# EAGLE board lightMiner (EAGLE 9.5.2)
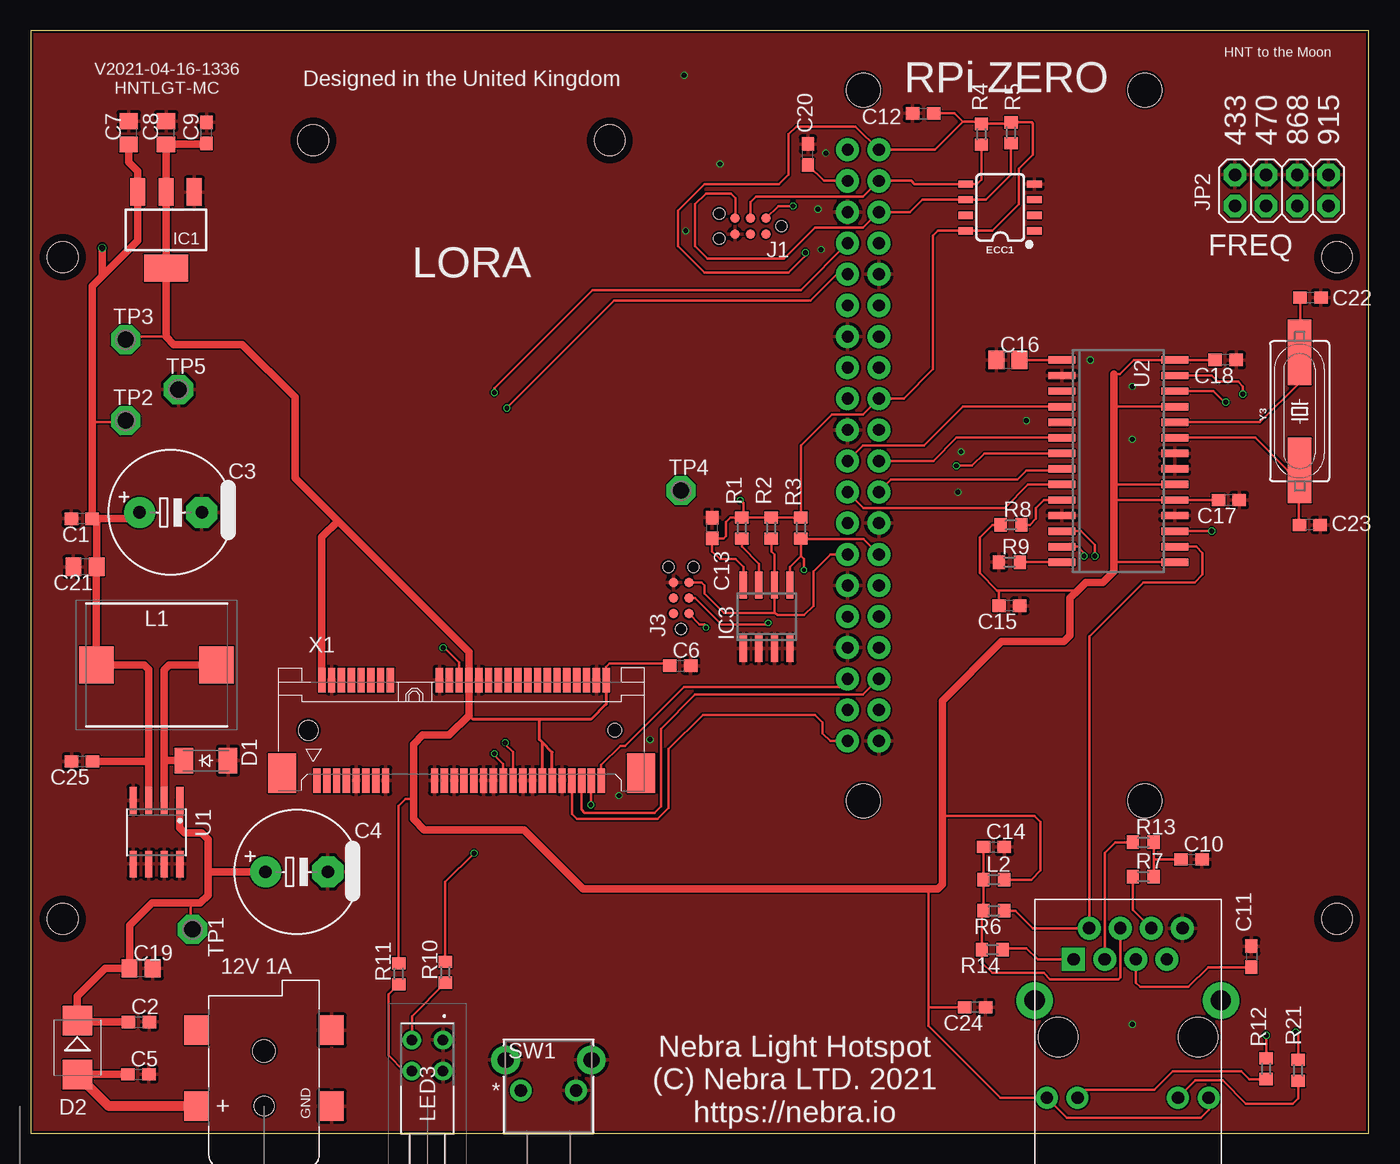
[diagram p0: board, top side]
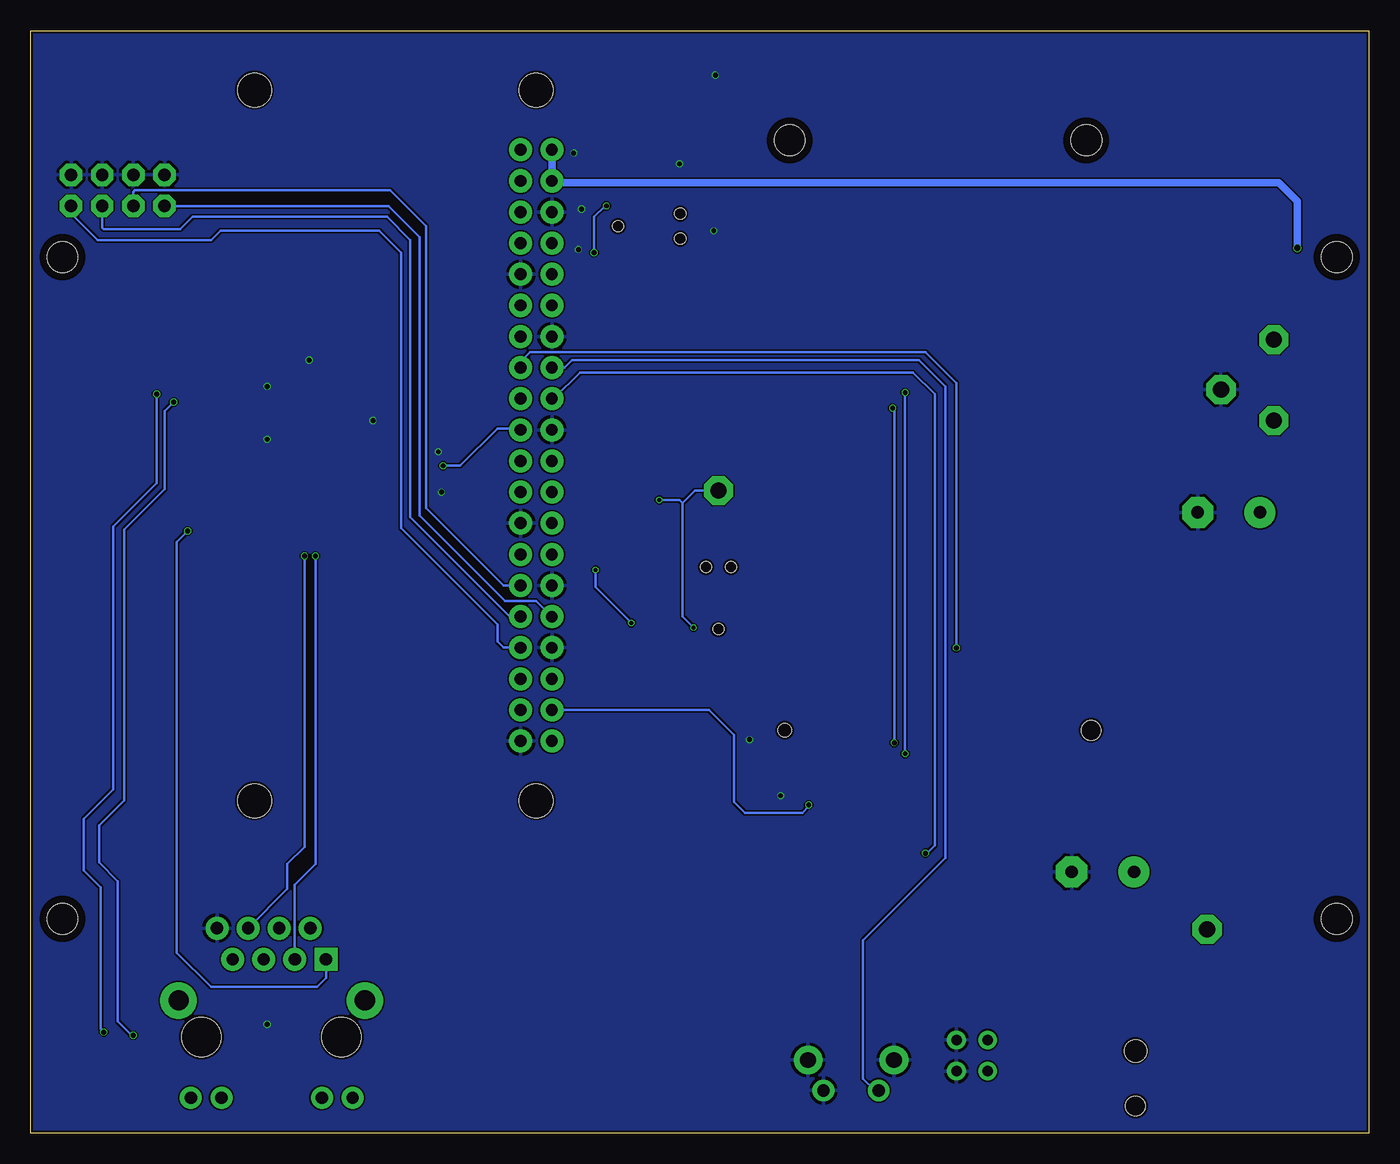
[diagram p1: board, bottom side, seen from below]

Size 109.22 x 90 mm. Coordinates in mm from the lower left corner, seen from the top.
Outline: 0,0 109.22,0 109.22,90 0,90 0,0
Copper layers (1*16): Top 0.035mm / dielectric 1.6mm / Bottom 0.035mm
Design rules "jlcpcb-2layers": minimum track width 5mil, minimum drill 0.3mm, track to track 5mil, track to pad 5mil, pad to pad 5mil, via to via 5mil, smd to smd 5mil, copper to edge 0.2mm, drill to drill 6mil, minimum pad ring 10mil, minimum via ring 3mil, stop-mask expansion 4mil, vias tented up to drill 0mil, thermal gap 10mil
Holes 2.5 mm at 2.62,17.5 106.62,17.5 2.62,71.5 106.62,71.5
tRestrict: area 0.8,69.7 to 4.4,73.3; area 0.8,15.7 to 4.4,19.3; area 104.8,15.7 to 108.4,19.3; area 104.8,69.7 to 108.4,73.3
bRestrict: area 0.8,69.7 to 4.4,73.3; area 104.8,15.7 to 108.4,19.3; area 104.8,69.7 to 108.4,73.3; area 0.8,15.7 to 4.4,19.3

## Footprints (pad centres in the part's own frame; a part is rotated, then mirrored left to right if it is on the bottom)
C0603 = smd 1.1 x 1: 1 -0.85,0; 2 0.85,0
E5-10,5 = drill 1.016 pad 2.54: + -2.54,0 | drill 1.016 pad 2.54 octagon: - 2.54,0
C0805 = smd 1.3 x 1.5: 1 -0.95,0; 2 0.95,0
DCJACK_2MM_SMT = smd 2.4 x 2: GND 0,-5.5; GNDBREAK 6.2,-5.5; PWR1 0,5.5; PWR2 6.2,5.5 | hole 1.6: 0,0 | hole 1.8: 4.5,0
SOD-123_MINI-SMA = smd 1.5 x 2.1: A 1.8,0; C -1.8,0
SMB = smd 2.4 x 2.4: A 2.2,0; C -2.2,0
SO08 = smd 0.6 x 1.2: 1 -1.905,-2.8; 2 -0.635,-2.8; 3 0.635,-2.8; 4 1.905,-2.8; 5 1.905,2.8; 6 0.635,2.8; 7 -0.635,2.8; 8 -1.905,2.8
SOT-223-3 = smd 1.219 x 2.235: 1 -2.311,-3.099; 2 0,-3.099; 3 2.311,-3.099 | smd 3.6 x 2.2: 4 0,3.099
SO-08 = smd 0.6 x 2.2: 1 -1.905,-2.6; 2 -0.635,-2.6; 3 0.635,-2.6; 4 1.905,-2.6; 5 1.905,2.6; 6 0.635,2.6; 7 -0.635,2.6; 8 -1.905,2.6
TC2030-MCP-NL = smd 0.787 x 0.787: 1 1.27,-0.635; 2 1.27,0.635; 3 2.54,-0.635; 4 2.54,0.635; 5 3.81,-0.635; 6 3.81,0.635 | hole 0.889: 0,0; 5.08,-1.016; 5.08,1.016
HR911105A = drill 1 pad 1.88 square: 1 5.05,2.485 | drill 1 pad 1.88: 2 3.78,-0.055; 3 2.51,2.485; 4 1.24,-0.055; 5 -0.03,2.485; 6 -1.3,-0.055; 7 -2.57,2.485; 8 -3.84,-0.055 | drill 1 pad 1.27: 9 7.225,13.79; 10 4.725,13.79; 11 -3.475,13.79; 12 -5.975,13.79 | drill 1.65 pad 2.184: M1 8.225,5.84; M2 -6.975,5.84 | hole 3.2: 6.32,8.835; -5.11,8.835
2X04 = drill 1.016 octagon: 1 -3.81,-1.27; 2 -3.81,1.27; 3 -1.27,-1.27; 4 -1.27,1.27; 5 1.27,-1.27; 6 1.27,1.27; 7 3.81,-1.27; 8 3.81,1.27
INDPM115100X410N = smd 2.8 x 3.05: 1 -4.9,0; 2 4.9,0
R0603 = smd 1 x 1.1: 1 -0.85,0; 2 0.85,0
LTL42D1NMHDP1 = drill 0.85 pad 1.381: 1 0,0; 2 0,2.54; 3 -2.54,0; 4 -2.54,2.54
SW2_1825027-C_TEC = drill 0.991 pad 1.499: 1 0,0; 2 4.496,0 | drill 1.295 pad 1.803: 3 -1.245,2.489; 4 5.766,2.489
P1-13 = drill 1.321 pad 2.159 octagon: TP 0,0
SO08' = smd 0.6 x 2.2: 1 -1.905,-2.6; 2 -0.635,-2.6; 3 0.635,-2.6; 4 1.905,-2.6; 5 1.905,2.6; 6 0.635,2.6; 7 -0.635,2.6; 8 -1.905,2.6
SO28W = smd 0.6 x 2.2: 1 -8.255,-4.6; 2 -6.985,-4.6; 3 -5.715,-4.6; 4 -4.445,-4.6; 5 -3.175,-4.6; 6 -1.905,-4.6; 7 -0.635,-4.6; 8 0.635,-4.6; 9 1.905,-4.6; 10 3.175,-4.6; 11 4.445,-4.6; 12 5.715,-4.6; 13 6.985,-4.6; 14 8.255,-4.6; 15 8.255,4.6; 16 6.985,4.6; 17 5.715,4.6; 18 4.445,4.6; 19 3.175,4.6; 20 1.905,4.6; 21 0.635,4.6; 22 -0.635,4.6; 23 -1.905,4.6; 24 -3.175,4.6; 25 -4.445,4.6; 26 -5.715,4.6; 27 -6.985,4.6; 28 -8.255,4.6
RASPBERRY-PI-ZERO = drill 0.97 pad 1.88: 1 -23.97,23.23; 2 -23.97,25.77; 3 -21.43,23.23; 4 -21.43,25.77; 5 -18.89,23.23; 6 -18.89,25.77; 7 -16.35,23.23; 8 -16.35,25.77; 9 -13.81,23.23; 10 -13.81,25.77; 11 -11.27,23.23; 12 -11.27,25.77; 13 -8.73,23.23; 14 -8.73,25.77; 15 -6.19,23.23; 16 -6.19,25.77; 17 -3.65,23.23; 18 -3.65,25.77; 19 -1.11,23.23; 20 -1.11,25.77; 21 1.43,23.23; 22 1.43,25.77; 23 3.97,23.23; 24 3.97,25.77; 25 6.51,23.23; 26 6.51,25.77; 27 9.05,23.23; 28 9.05,25.77; 29 11.59,23.23; 30 11.59,25.77; 31 14.13,23.23; 32 14.14,25.77; 33 16.67,23.23; 34 16.67,25.77; 35 19.21,23.23; 36 19.21,25.77; 37 21.75,23.23; 38 21.75,25.77; 39 24.29,23.23; 40 24.29,25.77 | hole 2.75: -28.84,24.5; 29.16,24.5; -28.84,1.5; 29.16,1.5
679105700 = smd 0.6 x 2: 1 0.7,-4.1; 2 1.1,4.1; 3 1.5,-4.1; 4 1.9,4.1; 5 2.3,-4.1; 6 2.7,4.1; 7 3.1,-4.1; 8 3.5,4.1; 9 3.9,-4.1; 10 4.3,4.1; 11 4.7,-4.1; 12 5.1,4.1; 13 5.5,-4.1; 14 5.9,4.1; 15 6.3,-4.1; 16 6.7,4.1; 17 10.3,-4.1; 18 10.7,4.1; 19 11.1,-4.1; 20 11.5,4.1; 21 11.9,-4.1; 22 12.3,4.1; 23 12.7,-4.1; 24 13.1,4.1; 25 13.5,-4.1; 26 13.9,4.1; 27 14.3,-4.1; 28 14.7,4.1; 29 15.1,-4.1; 30 15.5,4.1; 31 15.9,-4.1; 32 16.3,4.1; 33 16.7,-4.1; 34 17.1,4.1; 35 17.5,-4.1; 36 17.9,4.1; 37 18.3,-4.1; 38 18.7,4.1; 39 19.1,-4.1; 40 19.5,4.1; 41 19.9,-4.1; 42 20.3,4.1; 43 20.7,-4.1; 44 21.1,4.1; 45 21.5,-4.1; 46 21.9,4.1; 47 22.3,-4.1; 48 22.7,4.1; 49 23.1,-4.1; 50 23.5,4.1; 51 23.9,-4.1; 52 24.3,4.1 | smd 2.3 x 3.2: M1 27.15,-3.5; M2 -2.15,-3.5 | hole 1.6: 0,0 | hole 1.1: 25,0 | hole 2.5: 0.4,48.15; 24.6,48.15
HC49UP = smd 5.334 x 1.93: 1 -4.826,0; 2 4.826,0

## Placement (x,y rotation side)
C1  100nF  [C0603]  4.17,50.16 180 top
C2  100nF  [C0603]  8.84,9.09 0 top
C3  330uF  [E5-10,5]  11.43,50.67 0 top
C4  330uF  [E5-10,5]  21.72,21.34 0 top
C5  100nF  [C0603]  8.79,4.81 0 top
C6  100nF  [C0603]  53.02,38.16 0 top
C7  10uF  [C0805]  8,81.66 90 top
C8  10uF  [C0805]  11.05,81.66 90 top
C9  100nF  [C0603]  14.35,81.66 90 top
C10  10nF  [C0603]  94.74,22.35 0 top
C11  100nF  [C0603]  99.63,14.41 270 top
C12  100nF  [C0603]  72.83,83.25 0 top
C13  100nF  [C0603]  55.63,49.4 90 top
C14  100nF  [C0603]  78.61,23.37 0 top
C15  100nF  [C0603]  79.88,43.05 180 top
C16  10uF  [C0805]  79.76,63.12 0 top
C17  100nF  [C0603]  97.79,51.69 180 top
C18  100nF  [C0603]  97.54,63.12 180 top
C19  10uF  [C0805]  9.02,13.46 0 top
C20  100nF  [C0603]  63.44,79.88 90 top
C21  10uF  [C0805]  4.44,46.23 180 top
C22  18pF  [C0603]  104.46,68.2 180 top
C23  18pF  [C0603]  104.39,49.66 180 top
C24  100nF  [C0603]  77.09,10.29 180 top
C25  100nF  [C0603]  4.19,30.35 180 top
CN1  [DCJACK_2MM_SMT]  19.05,2.22 90 top
D1  CGRM4001-G  [SOD-123_MINI-SMA]  14.3,30.42 0 top
D2  [SMB]  3.81,6.99 270 top
ECC1  ATECC608  [SO08]  79.12,75.56 90 top
IC1  LM1117-SOT223  [SOT-223-3]  11.05,73.72 180 top
IC3  24C32ASN  [SO-08]  60.07,42.16 0 top
J1  [TC2030-MCP-NL]  61.28,74.04 180 top
J2  HR911105A  [HR911105A]  90.17,16.68 180 top
J3  [TC2030-MCP-NL]  53.09,41.15 90 top
JP2  [2X04]  102.11,76.96 0 top
L1  7419290  [INDPM115100X410N]  10.27,38.22 180 top
L2  [R0603]  78.61,20.7 0 top
LED3  LTL-42D1NMHDP1  [LTL42D1NMHDP1]  33.66,7.62 90 top
R1  4.7k  [R0603]  58.04,49.4 90 top
R2  4.7k  [R0603]  60.45,49.4 90 top
R3  4.7k  [R0603]  62.86,49.4 90 top
R4  4.7k  [R0603]  77.6,81.53 90 top
R5  4.7k  [R0603]  80.01,81.66 90 top
R6  49.9R  [R0603]  78.61,18.16 180 top
R7  49.9R  [R0603]  90.8,20.95 0 top
R8  10K  [R0603]  80.01,49.66 0 top
R9  2.32K  [R0603]  79.88,46.61 0 top
R10  470r  [R0603]  33.85,13.14 90 top
R11  470r  [R0603]  30.04,13.02 90 top
R12  470r  [R0603]  100.84,5.27 90 top
R13  49.9R  [R0603]  90.8,23.75 0 top
R14  49.9R  [R0603]  78.49,14.99 180 top
R21  470r  [R0603]  103.44,5.14 90 top
SW1  1825027-8  [SW2_1825027-C_TEC]  40,3.49 0 top
TP1  TPPAD1-13  [P1-13]  13.21,16.64 270 top
TP2  TPPAD1-13  [P1-13]  7.75,58.17 0 top
TP3  TPPAD1-13  [P1-13]  7.75,64.77 0 top
TP4  TPPAD1-13  [P1-13]  53.09,52.45 0 top
TP5  TPPAD1-13  [P1-13]  12.06,60.71 0 top
U1  AP1509  [SO08']  10.27,24.57 180 top
U2  ENC28J60-SO  [SO28W]  88.77,54.86 270 top
U$1  RASPBERRY-PI+PIZERO  [RASPBERRY-PI-ZERO]  92.45,56.3 270 bottom
X1  679105700  [679105700]  22.67,32.89 0 top
Y3  25Mhz  [HC49UP]  103.57,58.93 90 top

## Library data of the parts
C1-C25 L2 R1-R14 R21 = resistor
CN1 = adafruit
D1 D2 = diode
ECC1 = SparkFun-IC-Special-Function; PROD_ID: IC-11982
IC1 U1 = bt_regulator
IC3 = microchip; MPN: IS24C32A-2GLI; OC_FARNELL: 1224413; OC_NEWARK: 43M4588
J1 J3 = tag-connect
J2 = DECADE-libraries20151104
JP2 = pinhead
L1 = SamacSys_Parts; DESCRIPTION: RS Pro NPIS104F Series Shielded Wire-wound SMD Inductor 47 H 20% 1.9A Idc; HEIGHT: 4.1mm; MANUFACTURER_NAME: RS Components; MANUFACTURER_PART_NUMBER: 7419290; RS_PART_NUMBER: 7419290
LED3 = LTL-42D1NMHDP1; ARROW_PART_NUMBER: LTL-42D1NMHDP1; ARROW_PRICE-STOCK: https://www.arrow.com/en/products/ltl-42d1nmhdp1/lite-on-technology; DESCRIPTION: LED Circuit Board Indicators Housing LED ThruHole 3mm 2Lvl Grn/Yellow; HEIGHT: 9.6mm; MANUFACTURER_NAME: Lite-On; MANUFACTURER_PART_NUMBER: LTL-42D1NMHDP1; MOUSER_PART_NUMBER: 859-LTL-42D1NMHDP1; MOUSER_PRICE-STOCK: https://www.mouser.co.uk/ProductDetail/Lite-On/LTL-42D1NMHDP1?qs=WxFF5lh7QM1L2xMrizlF%2FQ%3D%3D
SW1 = ryanteck; BUILT_BY: EMA_UL_Team; CONFIGURATION__POLE-THROW_: Single Pole - Single Throw; COPYRIGHT: Copyright (C) 2016 Accelerated Designs. All rights reserved; DESCRIPTION: FSMRA3JH04=R/A,TACT PB SW,160G; MANUFACTURER_PART_NUMBER: 1825027-8; MAX_SWITCHING_CURRENT: -; MAX_SWITCHING_VOLTAGE_AC_: -; PRODUCT_TYPE: Switch; SOURCELIBRARY: TE_Connectivity-2018-03-16; SWITCH_TYPE: Tactile Switches; TE_PART_NUMBER: 1825027-8; VENDOR: TE Connectivity
TP1-TP5 = testpad
U2 = microchip-enc28j60
U$1 = Ava
X1 = con-molex-3; MPN: 67910-5700; OC_FARNELL: unknown; OC_NEWARK: 93M2128
Y3 = SparkFun-Clocks

## Nets
+3V3: C6.1 C8.1 C9.1 C15.2 C17.2 C18.2 C24.2 IC1.2 IC1.4 J2.9 J2.12 L2.2 R8.1 R11.2 TP3.TP U2.15 U2.19 U2.20 U2.25 U2.28 X1.2 X1.24 X1.39 X1.41 X1.52
+5V: C1.1 C3.+ C7.1 C20.1 C21.1 C25.1 IC1.3 L1.2 TP2.TP U1.3 U$1.2 U$1.4
+12V: C2.1 C4.+ C19.1 D2.C TP1.TP U1.1
BUTTON: SW1.1 U$1.16
ECC_SCL: ECC1.6 J1.5 R5.1 U$1.5
ECC_SDA: ECC1.5 J1.3 R4.1 U$1.3
ENC_INT: U2.4 U$1.22
FR433: JP2.1 U$1.32
FR470: JP2.3 U$1.29
FR868: JP2.5 U$1.31
FR915: JP2.7 U$1.33
GND: C1.2 C2.2 C3.- C4.- C5.2 C6.2 C7.2 C8.2 C9.2 C10.2 C11.1 C12.1 C13.2 C14.2 C15.1 C16.1 C17.1 C18.1 C19.2 C20.2 C21.2 C22.1 C23.1 C24.1 C25.2 CN1.GND CN1.GNDBREAK D1.A ECC1.4 IC1.1 IC3.1 IC3.2 IC3.3 IC3.4 J1.6 J2.8 J3.6 JP2.2 JP2.4 JP2.6 JP2.8 LED3.1 LED3.3 R9.1 SW1.2 SW1.3 SW1.4 TP5.TP U1.4 U1.5 U1.6 U1.7 U1.8 U2.2 U2.11 U2.18 U2.21 U2.22 U$1.6 U$1.9 U$1.14 U$1.20 U$1.25 U$1.30 U$1.34 U$1.39 X1.4 X1.9 X1.15 X1.17 X1.18 X1.21 X1.26 X1.27 X1.29 X1.35 X1.37 X1.43 X1.50
GPS_RX: U$1.10 X1.33
GPS_TX: U$1.8 X1.31
ID_SC: IC3.6 J3.5 R2.1 U$1.28
ID_SD: IC3.5 J3.3 R3.1 U$1.27
LED_LNK: R21.2 U2.27
LED_SPD: R12.2 U2.26
LORA_RS1: U$1.15 X1.22
N$1: C5.1 CN1.PWR1 D2.A
N$2: J2.11 R21.1
N$3: C10.1 R7.2 R13.2
N$4: J3.2
N$5: IC3.7 R1.1
N$6: LED3.4 R11.1
N$7: J2.10 R12.1
N$8: LED3.2 R10.1
N$9: C16.2 U2.1
N$10: D1.C L1.1 U1.2
N$11: C11.2 J2.5
N$12: C22.2 U2.24 Y3.2
N$13: C14.1 J2.4 L2.1 R6.2 R14.2
N$18: R8.2 U2.10
N$19: R9.2 U2.14
N$37: C23.2 U2.23 Y3.1
RD+: J2.3 R13.1 U2.13
RD-: J2.6 R7.1 U2.12
SP1_MOSI: U$1.38 X1.49
SPI0_CE0: U2.9 U$1.24
SPI0_MISO: U2.6 U$1.21
SPI0_MOSI: U2.7 U$1.19
SPI0_SCLK: U2.8 U$1.23
SPI1_CE2: U$1.36 X1.51
SPI1_MISO: U$1.35 X1.47
SPI1_SCLK: U$1.40 X1.45
STATUS_LED: R10.2 U$1.18
TD+: J2.1 R14.1 U2.17
TD-: J2.2 R6.1 U2.16
VCCINT: C12.2 C13.1 ECC1.8 IC3.8 J1.1 J3.1 R1.2 R2.2 R3.2 R4.2 R5.2 TP4.TP U$1.1 U$1.17
VDD: J1.2

## Tracks (layer width: path | path; a pad name or v marks a point on that pad's centre or on a via)
+3V3
  Top 0.203: R11.2 30.04,26.73 30.61,27.3 31.24,27.3 | J2.12 96.14,1.91 95.5,1.27 84.57,1.27 J2.9 79.15,2.9 73.28,8.76 73.28,10.29 | X1.52 46.97,38.08 47.24,38.35 51.98,38.35 C6.1 | C17.2 U2.19 88.52,51.69 88.39,51.82 | R8.1 78.49,49.66 77.47,48.64 77.47,45.72 78.87,44.32 | 78.87,44.32 79.03,44.16 C15.2 | C18.2 U2.28 90.04,63.12 88.9,61.98 88.39,61.98 | 88.39,59.44 88.52,59.31 U2.25 | U2.20 88.39,52.96 | U2.15 88.39,46.61 | 78.87,44.32 85.47,44.32 | L2.2 81.66,20.7 82.42,21.46 82.42,25.4 81.91,25.91 74.42,25.91 | 73.28,10.29 73.28,19.94 | C24.2 73.28,10.29 | TP3.TP 8,65.02 11.05,65.02
  Top 0.254: X1.52 46.97,35.03 45.72,33.78 41.53,33.78 | 41.53,33.78 36.11,33.78 35.77,34.12 | X1.41 42.57,31.09 41.77,31.89 | 41.53,33.78 41.53,32.13 41.77,31.89 | X1.39 41.77,31.89
  Top 0.61: 25.08,49.97 35.77,39.29 X1.24 35.77,34.12 34.16,32.51 32,32.51 31.24,31.75 31.24,27.3 31.24,25.65 32.13,24.77 40.26,24.77 45.08,19.94 73.28,19.94 74.04,19.94 74.42,20.32 74.42,25.91 74.42,35.31 79.25,40.13 84.33,40.13 84.84,40.64 84.84,43.69 85.47,44.32 86.11,44.96 87.5,44.96 88.39,45.85 88.39,46.61 88.39,51.82 88.39,52.96 88.39,59.44 88.39,61.98 | 25.08,49.97 21.59,53.47 21.59,60.08 17.28,64.39 11.68,64.39 11.05,65.02 IC1.4 IC1.2 C8.1 14.25,80.71 C9.1 | X1.2 23.77,48.66 25.08,49.97
+5V  (via drill 0.5)
  Top 0.203: U$1.4 64.73,77.73 C20.1 | TP2.TP 7.62,58.04 5.02,58.04
  Top 0.61: C1.1 5.39,49.79 C21.1 5.37,46.2 L1.2 9.27,38.23 9.64,37.86 9.64,30.35 | C3.+ 8.38,50.16 C1.1 | C1.1 5.02,58.04 5.02,69.16 5.84,69.98 | 5.84,69.98 8.74,72.87 IC1.3 8.74,78.51 8,79.25 C7.1 | v5.84,72.26 5.84,69.98 | U1.3 9.64,30.35 | C25.1 9.64,30.35
  Bottom 0.61: U$1.2 U$1.4 66.55,77.6 7.37,77.6 5.84,76.07 v5.84,72.26
+12V
  Top 0.203: TP1.TP 13.08,16.76 13.08,18.8
  Top 0.61: C2.1 3.91,9.09 D2.C 3.81,11.18 6.1,13.46 C19.1 8.07,16.96 9.91,18.8 13.08,18.8 13.84,18.8 14.48,19.43 14.48,21.34 | U1.1 12.18,24.91 12.57,24.51 13.97,24.51 14.48,24 14.48,21.34 | C4.+ 14.48,21.34
BUTTON
  Bottom 0.203: U$1.16 65.65,62.49 65.02,63.12 36.7,63.12 34.54,60.96 34.54,22.48 41.27,15.75 41.27,4.45 40.32,3.49 SW1.1
ECC_SCL
  Top 0.203: R5.1 80.01,78.23 77.98,76.2 ECC1.6 72.77,76.2 71.77,75.19 U$1.5 67.94,73.91 64.01,73.91 61.47,71.37 55.24,71.37 54.23,72.39 54.23,75.82 55.12,76.71 57.15,76.71 57.53,76.33 57.53,74.74 J1.5
ECC_SDA
  Top 0.203: R4.1 77.6,77.85 77.22,77.47 ECC1.5 72.14,77.47 71.87,77.73 U$1.3 67.94,76.45 59.18,76.45 58.74,76.01 J1.3
ENC_INT
  Top 0.203: U$1.22 67.94,56.13 72.9,56.13 76.07,59.31 U2.4
FR433
  Bottom 0.203: JP2.1 80.01,75.69 77.47,73.15 77.47,50.42 70.48,43.43 67.95,43.43 U$1.32
FR470
  Bottom 0.203: U$1.29 70.62,44.72 76.96,51.05 76.96,74.04 79.88,76.96 100.71,76.96 100.84,76.83 JP2.3
FR868
  Bottom 0.203: U$1.31 70.11,42.17 78.23,50.29 78.23,72.9 80.14,74.8 96.01,74.8 97.03,73.79 103.25,73.79 103.38,73.91 JP2.5
FR915
  Bottom 0.203: JP2.7 105.92,75.06 103.76,72.9 94.49,72.9 93.73,73.66 80.77,73.66 78.99,71.88 78.99,49.4 71.12,41.53 71.12,40.13 70.62,39.63 U$1.33
GND  (via drill 0.4)
  other vias: 56.26,79.12 64.26,75.44 64.9,80.01 64.52,72.14 89.92,56.64 89.92,60.96 86.49,63.12 81.28,58.17 75.95,55.63 75.69,52.32 89.92,8.89 48.01,27.56 50.55,32.13 53.47,73.66 53.34,86.36
  pour Top: -3.18,-3.17 -3.18,88.27 0.95,92.39 109.85,92.39 114.93,87.31 114.93,1.27 108.58,-5.08 -1.27,-5.08
  pour Bottom: -3.18,-2.54 -3.18,90.81 -1.27,92.71 111.12,92.71 114.93,88.9 114.93,2.54 107.31,-5.08 -0.64,-5.08
GPS_RX  (via drill 0.4)
  Top 0.203: X1.33 39.37,31.12 38.73,31.75 v38.73,31.88 | v38.86,59.18 47.62,67.94 63.63,67.94 65.8,70.11 U$1.10
  Bottom 0.203: v38.86,59.18 38.73,59.05 v38.73,31.88
GPS_TX  (via drill 0.4)
  Top 0.203: X1.31 38.57,30.14 37.85,30.86 v37.85,30.99 | U$1.8 62.86,68.83 45.85,68.83 37.85,60.83 v37.85,60.45
  Bottom 0.203: v37.85,60.45 v37.85,30.99
ID_SC
  Top 0.203: R2.1 60.45,47.5 60.71,47.24 IC3.6 60.71,42.55 60.77,42.48 | U$1.28 65.29,47.26 63.88,45.85 63.88,43.05 63.12,42.29 60.96,42.29 60.77,42.48 | 60.77,42.48 56.58,42.48 54.99,44.07 54.99,44.7 54.74,44.96 J3.5
ID_SD  (via drill 0.35)
  Top 0.203: IC3.5 61.98,46.23 62.86,47.12 | 62.86,47.12 62.86,48.39 | 62.86,48.39 R3.1 | U$1.27 67.96,48.51 62.99,48.51 62.86,48.39 | J3.3 54.23,43.69 56.39,41.53 60.07,41.53 v60.2,41.66 | v63.12,45.97 63.12,46.86 62.86,47.12
  Bottom 0.203: v60.2,41.66 63.12,44.58 v63.12,45.97
LED_LNK  (via drill 0.4)
  Top 0.203: U2.27 96.39,61.85 96.9,61.34 98.55,61.34 98.93,60.96 v98.93,60.33 | v103.25,8.26 103.44,8.06 R21.2
  Bottom 0.203: v98.93,60.33 98.93,53.09 102.49,49.53 102.49,28.07 104.9,25.65 104.9,21.46 103.5,20.07 103.5,8.51 v103.25,8.26
LED_SPD  (via drill 0.4)
  Top 0.203: U2.26 96.52,60.58 97.41,59.69 v97.54,59.69 | v100.84,8 R12.2
  Bottom 0.203: v97.54,59.69 98.3,58.93 98.3,52.58 101.6,49.28 101.6,27.18 103.63,25.15 103.63,22.1 102.11,20.57 102.11,9.14 100.96,8 v100.84,8
LORA_RS1  (via drill 0.4)
  Top 0.203: X1.22 34.97,38.44 33.78,39.62 v33.66,39.62
  Bottom 0.203: v33.66,39.62 33.66,61.21 36.19,63.75 68.45,63.75 69.22,62.98 U$1.15
N$1
  Top 0.61: C5.1 3.83,4.81 D2.A
  Top 0.813: CN1.PWR1 6.37,2.22 D2.A
N$2
  Top 0.203: J2.11 95.07,4.32 97.28,4.32 99.19,2.41 103,2.41 103.44,2.86 R21.1
N$3
  Top 0.203: R7.2 91.66,22.35 | 91.66,22.35 R13.2 | C10.1 91.66,22.35
N$5
  Top 0.203: IC3.7 59.44,46.48 58.04,47.88 R1.1
N$6
  Top 0.203: LED3.4 30.48,5.08 29.21,6.35 29.21,11.34 R11.1
N$7
  Top 0.203: J2.10 86.11,3.56 91.69,3.56 93.22,5.08 98.81,5.08 99.46,4.42 R12.1
N$8
  Top 0.203: LED3.2 31.11,9.56 R10.1
N$9
  Top 0.203: U2.1 C16.2
N$10
  Top 0.61: U1.2 10.91,30.48 | 10.91,30.48 10.91,37.83 11.3,38.23 L1.1 | D1.C 10.96,30.42 10.91,30.48
N$11
  Top 0.203: J2.5 90.2,12.29 90.55,11.94 94.49,11.94 96.11,13.56 C11.2
N$12
  Top 0.203: U2.24 100.33,58.04 103.57,61.28 Y3.2 103.61,63.79 C22.2
N$13
  Top 0.203: J2.4 88.93,12.73 88.77,12.57 83.18,12.57 82.68,13.08 78.49,13.08 77.64,13.93 R14.2 77.64,18.03 R6.2 L2.1 C14.1
N$18
  Top 0.203: U2.10 82.68,51.69 82.04,51.05 82.04,50.16 81.53,49.66 R8.2
N$19
  Top 0.203: U2.14 R9.2
N$37
  Top 0.203: U2.23 99.95,56.77 102.62,54.1 103.5,54.1 | 103.5,54.1 Y3.1 | C23.2 103.5,49.7 103.5,54.1
RD+  (via drill 0.4)
  Top 0.203: U2.13 85.47,47.88 85.98,47.37 v85.98,47.12 | J2.3 87.66,22.89 88.52,23.75 R13.1
  Bottom 0.203: v85.98,47.12 85.98,21.97 87.66,20.29 J2.3
RD-  (via drill 0.4)
  Top 0.203: U2.12 85.72,49.15 86.87,48.01 v86.87,47.12 | J2.6 89.95,18.25 R7.1
  Bottom 0.203: v86.87,47.12 86.87,23.37 88.27,21.97 88.27,19.95 J2.6
SP1_MOSI  (via drill 0.4)
  Top 0.203: v45.72,26.8 45.72,28.74 X1.49
  Bottom 0.203: U$1.38 53.86,34.55 51.82,32.51 51.82,27.05 50.93,26.16 46.23,26.16 45.72,26.67 v45.72,26.8
SPI0_CE0
  Top 0.203: U2.9 81.41,52.96 79.5,51.05 67.96,51.05 U$1.24
SPI0_MISO
  Top 0.203: U$1.21 73.67,54.87 75.56,56.77 U2.6
SPI0_MOSI  (via drill 0.4)
  Top 0.203: U2.7 77.85,55.5 76.83,54.48 v75.56,54.48
  Bottom 0.203: v75.56,54.48 74.17,54.48 71.12,57.53 69.34,57.53 U$1.19
SPI0_SCLK
  Top 0.203: U$1.23 70.23,53.34 80.52,53.34 81.28,54.1 84.05,54.1 U2.8
SPI1_CE2
  Top 0.203: X1.51 46.57,30.06 48.13,31.62 48.51,31.62 53.34,36.45 66.04,36.45 U$1.36
SPI1_MISO
  Top 0.203: U$1.35 67.94,35.81 54.23,35.81 51.43,33.02 51.43,26.67 50.93,26.16 45.21,26.16 44.96,26.42 44.96,28.78 X1.47
SPI1_SCLK
  Top 0.203: X1.45 44.17,26.06 44.58,25.65 51.18,25.65 52.07,26.54 52.07,31.37 54.86,34.16 64.01,34.16 64.64,33.53 64.64,32.64 65.27,32.01 U$1.40
STATUS_LED  (via drill 0.4)
  Top 0.203: v36.19,22.86 33.84,20.51 R10.2
  Bottom 0.203: U$1.18 66.54,59.95 64.39,62.1 37.21,62.1 35.43,60.33 35.43,23.5 36.07,22.86 v36.19,22.86
TD+  (via drill 0.4)
  Top 0.203: J2.1 82.19,14.2 81.28,15.11 79.46,15.11 R14.1 | v96.39,49.15 U2.17
  Bottom 0.203: J2.1 85.12,12.67 85.85,11.94 94.49,11.94 97.28,14.73 97.28,48.26 v96.39,49.15
TD-
  Top 0.203: R6.1 80.39,18.16 81.81,16.74 J2.2 86.39,40.54 90.8,44.96 95,44.96 95.63,45.59 95.63,47.37 95.12,47.88 U2.16
VCCINT  (via drill 0.35, 0.4)
  Top 0.203: 76.07,82.55 73.8,80.28 U$1.1 67.33,82.17 62.48,82.17 61.85,81.53 61.85,78.23 61.09,77.47 54.99,77.47 52.83,75.31 52.83,72.39 54.99,70.23 61.85,70.23 63.25,71.63 v63.25,71.88 | 76.07,82.55 77.43,82.55 R4.2 79.88,82.38 R5.2 81.7,82.51 81.79,82.42 81.79,79.88 80.64,78.74 80.64,75.82 78.49,73.66 ECC1.8 74.04,73.66 73.66,73.28 73.66,62.36 71.26,59.95 U$1.17 67.94,58.67 65.41,58.67 62.86,56.13 R3.2 R2.2 58.17,50.25 | C12.2 75.38,83.25 76.07,82.55 | IC3.8 58.17,46.23 57.53,46.86 56.26,46.86 55.63,47.5 C13.1 56.55,48.55 56.77,48.77 56.77,49.91 57.11,50.25 R1.2 58.17,50.25 | J1.1 61.02,75.69 v62.23,75.69 | J3.1 54.61,41.53 54.99,41.53 55.12,41.4 v55.12,41.27 | v57.91,51.69 58.17,51.44 58.17,50.25
  Bottom 0.203: v63.25,71.88 63.25,74.8 62.36,75.69 v62.23,75.69 | v55.12,41.27 56.01,42.16 56.01,51.44 | 56.01,51.44 54.99,52.45 TP4.TP | 56.01,51.44 56.26,51.69 v57.91,51.69

## Text on the board
tNames: HNT to the Moon | Designed in the United Kingdom | V2021-04-16-1336 / HNTLGT-MC | RPi ZERO | 433 | 470 | 868 | 915 | FREQ | LORA | 12V 1A | Nebra Light Hotspot / (C) Nebra LTD. 2021 / https://nebra.io